# Altium PCB HeadBoard.PcbDoc
Units mil, origin at the board's own origin, x right, y up, seen from the top; angles counter-clockwise.
Board outline 3420.03 x 4025.03 mil, 2 copper layers (Top Layer, Bottom Layer); 34 components, 33 nets, 173 pads, 0 vias.
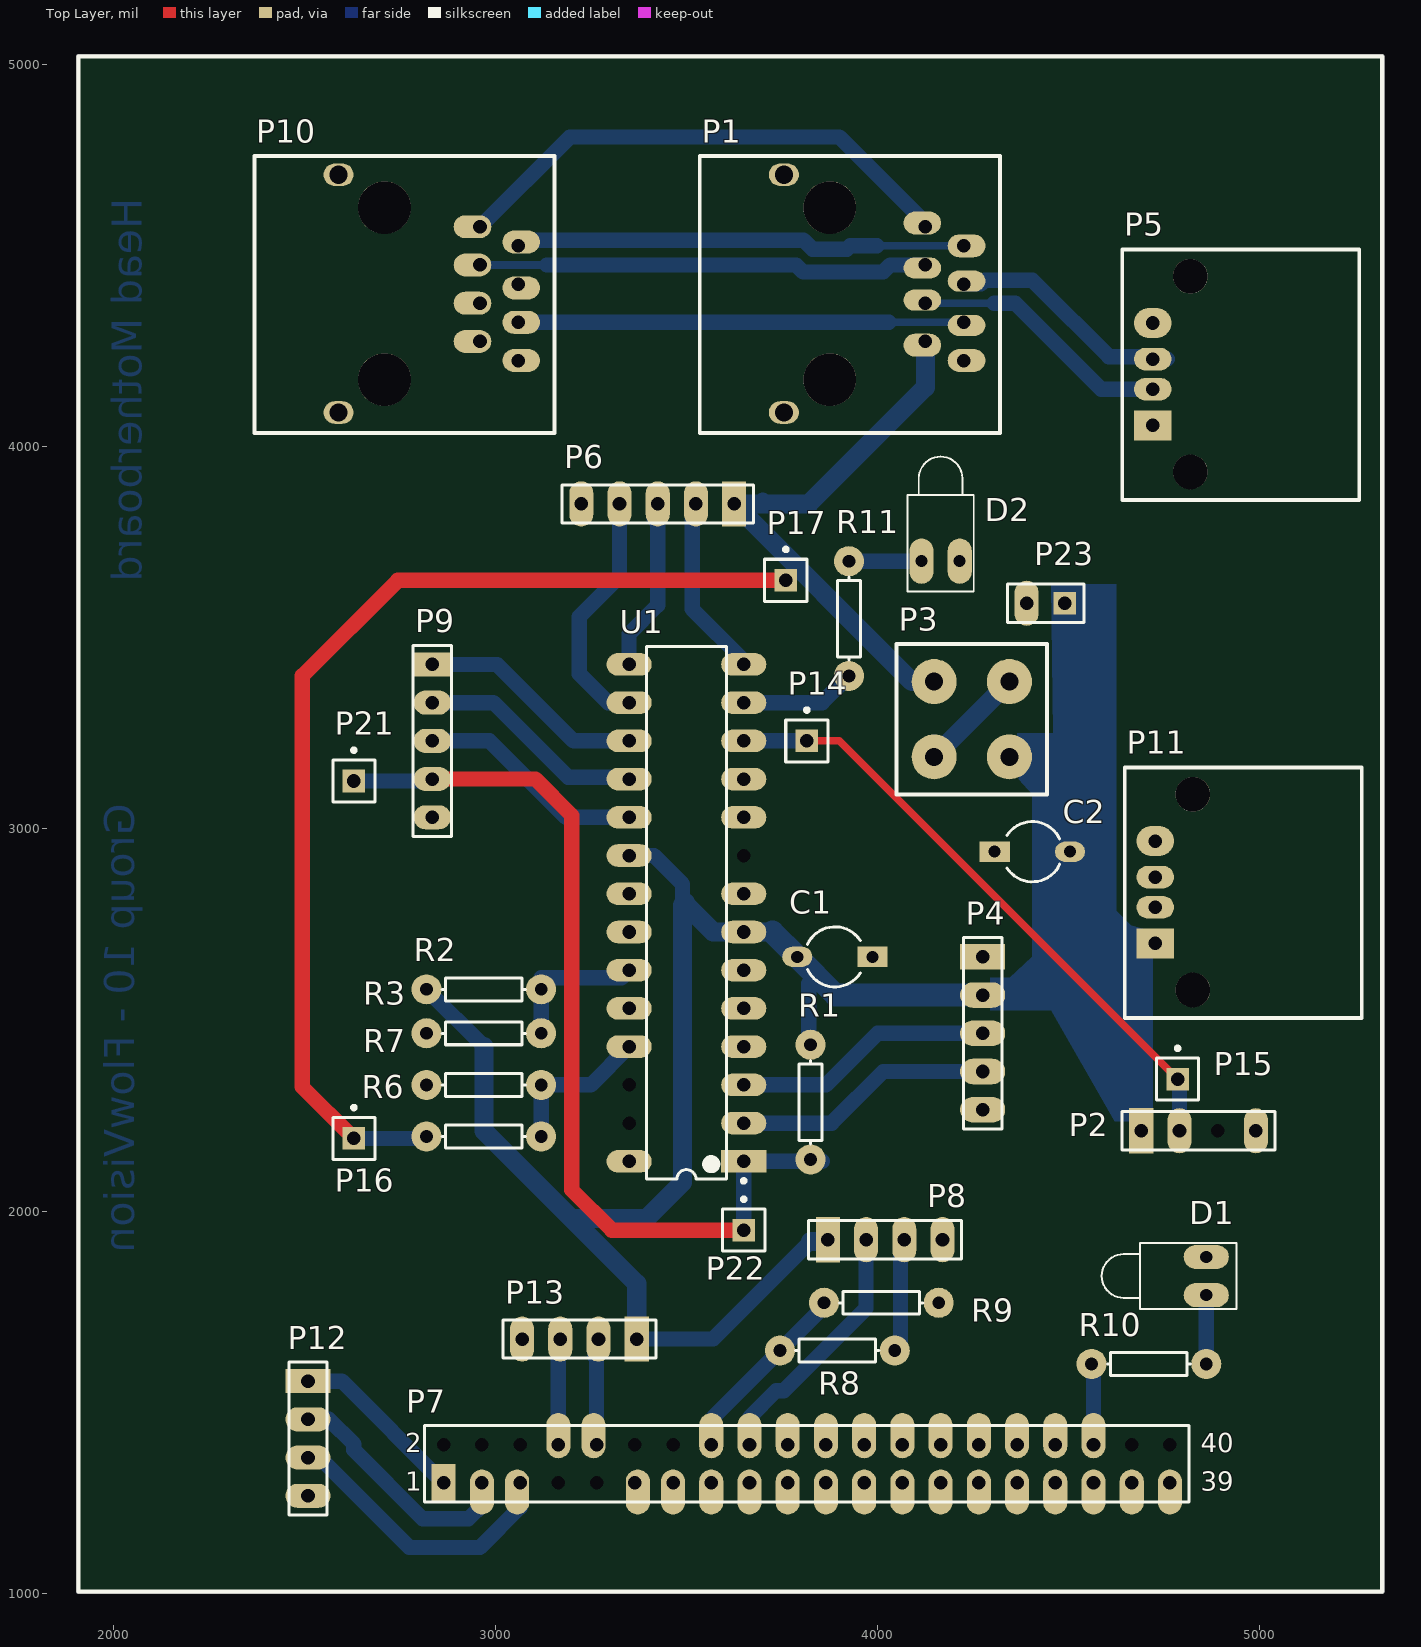
[diagram p0: Top Layer view]
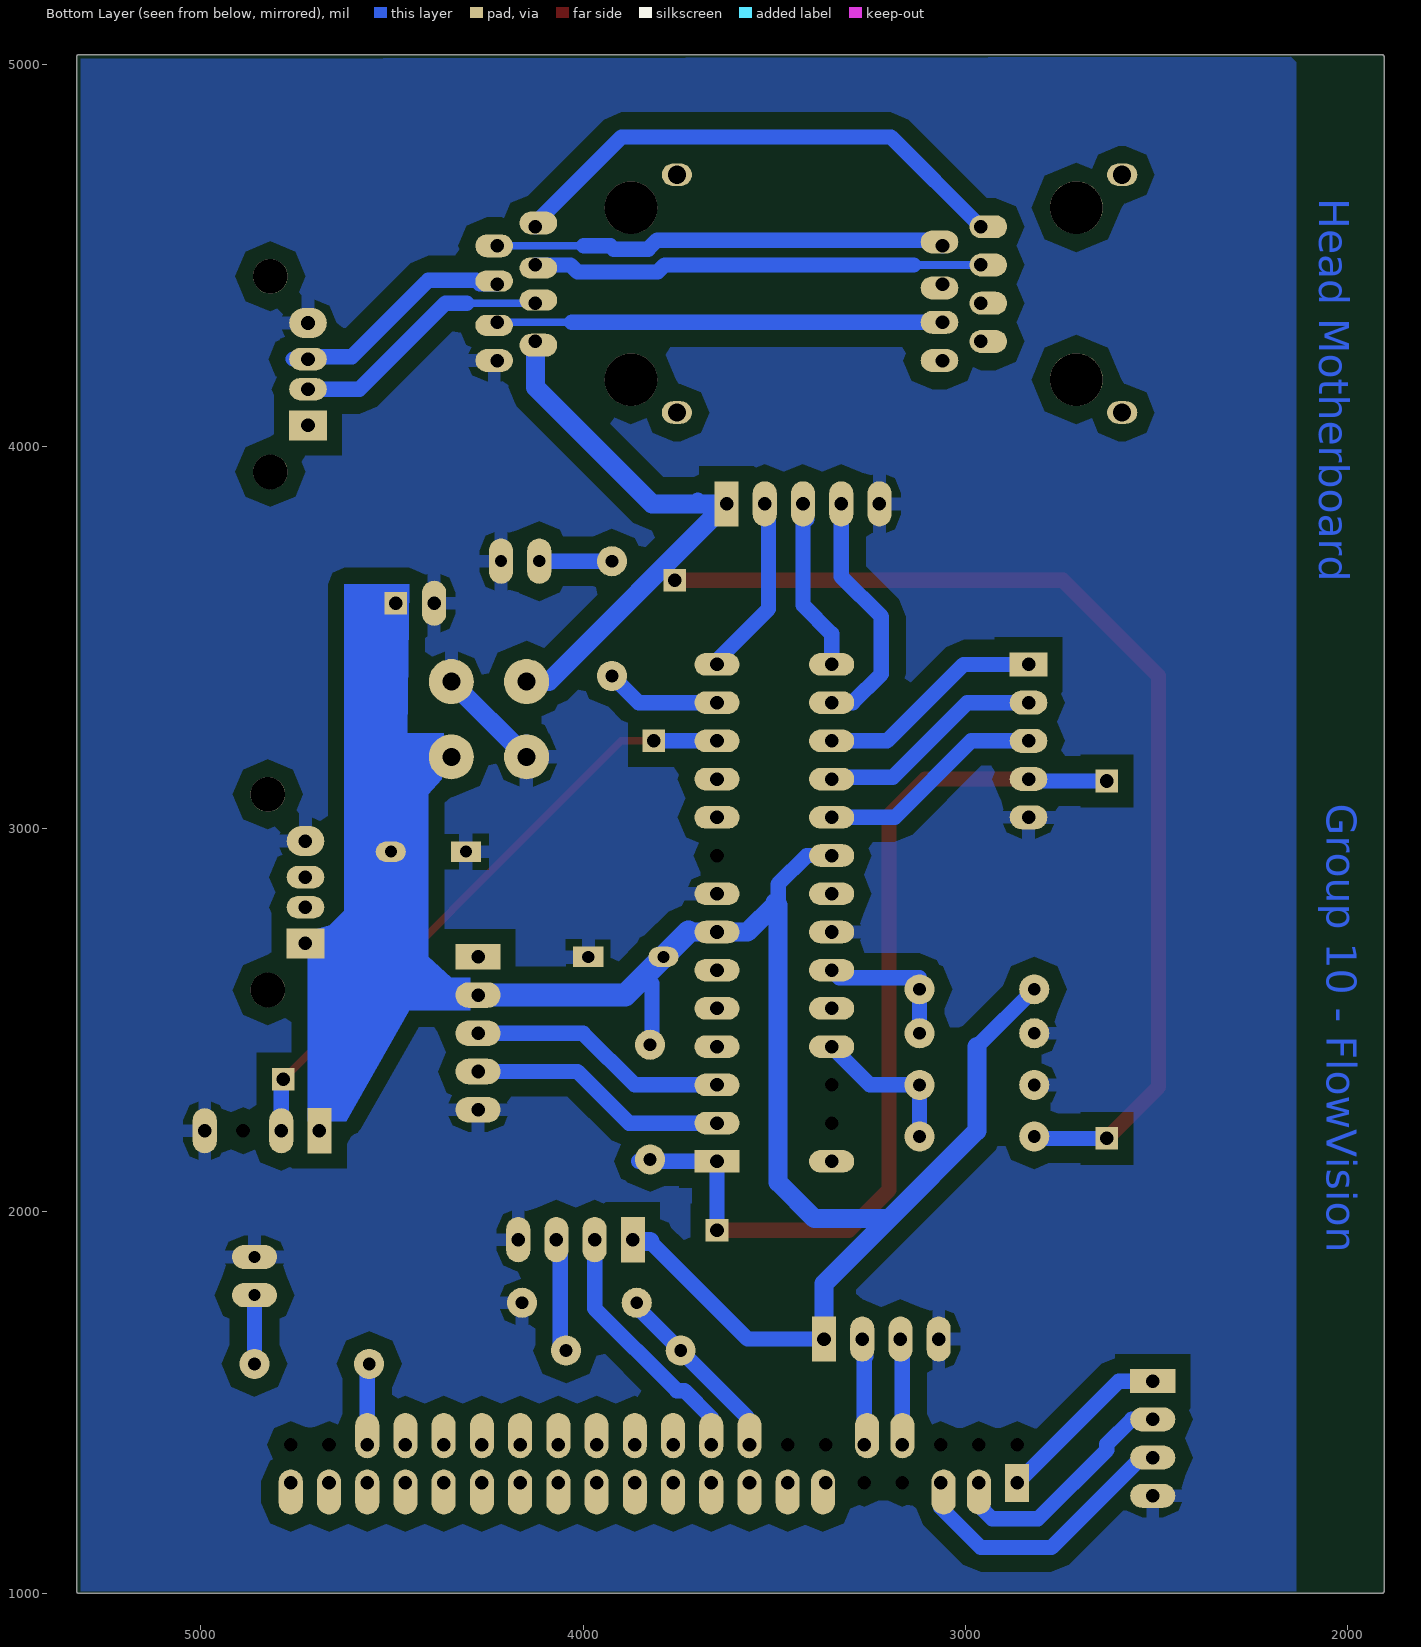
[diagram p1: Bottom Layer view, seen from below]

## Layer stack, top to bottom
Top Solder: solder mask 0.4, Solder Resist, Dk 3.5
Top Layer: signal copper 1.4
Dielectric 1: dielectric 12.6, FR-4, Dk 4.8
Bottom Layer: signal copper 1.4
Bottom Solder: solder mask 0.4, Solder Resist, Dk 3.5

## Board outline
1904.98,1005 ccw(c1910,1005) 1910,999.99 5320,999.99 ccw(c5320,1005) 5325.02,1005 5325.02,5020 ccw(c5320,5020) 5320,5025.02 1910,5025.02 ccw(c1910,5020) 1904.98,5020

## Design rules (kind name [scope] priority, off if disabled: settings)
Clearance [All] p1: gap=19.68 except(39.37: Arc-Poly Track-Poly SMDPad-Poly THPad-Poly Via-Poly Fill-Poly Poly-Poly Poly-Region)
PolygonConnect [All] p1: connectstyle=Relief reliefconductorwidth=35 reliefentries=4 polygonreliefangle="90 Angle" airgapwidth=20
RoutingVias [All] p1: holewidth=28 width=50 viastyle="Through Hole" minholewidth=28 minwidth=50 maxholewidth=28 maxwidth=50
SolderMaskExpansion [All] p1: expansion=4
Width [All] p1: maxlimit=70 minlimit=15 preferedwidth=20
30 further rules are at their usual default settings.

## Components (designator, comment, footprint, x,y, rotation, side; value= is the part's Value field where it differs from the comment)
C1 "Cap2" CAPR5-4X5 3888.43,2665 r180 top
C2 "Cap2" CAPR5-4X5 4405,2940 r0 top
D1 "Green" LED-1 4860,1830 r180 top
D2 "Red" LED-1 4165,3700 r90 top
P1 "RJ45 PUE - Tail" RJ45#1 4225,4525 r270 top
P2 "DHT11" HDR1X4#1 4690,2210 r0 top
P3 "Buck Conveter" PWR_HEADER 4246.57,3286.57 r270 top
P4 "USB to TTL - RPi" HDR1X5#1 4275,2665 r270 top
P5 "USB Data - RPi" USB_Female 4720,4055.51 r90 top
P6 "Flash" HDR1X5#2 3625,3850 r180 top
P7 "IDE GPIO - RPi" HDR2X20 2865,1288.62 r0 top
P8 "JSN-SR04T" HDR1X4#2 3870,1925 r0 top
P9 "ICSP" HDR1X5#3 2835,3430 r270 top
P10 "RJ45 Ethernet - RPi" RJ45#2 3060,4525 r270 top
P11 "USB Power - RPi" USB_Female 4726.57,2700.24 r90 top
P12 "ADXL345" HDR1X4#2 2510,1555 r270 top
P13 "RPi UART" HDR1X4#2 3370,1665 r180 top
P14 "Plug" PIN1 3815,3230 r0 top
P15 "Plug" PIN1 4785,2345 r0 top
P16 "Plug" PIN1 2630,2190 r0 top
P17 "Plug" PIN1 3760,3650 r0 top
P21 "Plug" PIN1 2630,3125 r0 top
P22 "Plug" PIN1 3650,1950 r0 top
P23 "Extra" HDR1X2 4490,3590 r180 top
R1 "Res1" AXIAL-0.3 3825,2285 r90 top
R2 "Res1" AXIAL-0.3 2970,2580 r180 top
R3 "Res1" AXIAL-0.3 2970,2465 r0 top
R6 "Res1" AXIAL-0.3 2970,2195 r180 top
R7 "Res1" AXIAL-0.3 2970,2330 r0 top
R8 "Res1" AXIAL-0.3 3895,1635 r180 top
R9 "Res1" AXIAL-0.3 4010,1760 r180 top
R10 "Res1" AXIAL-0.3 4710,1600 r180 top
R11 "Res1" AXIAL-0.3 3925,3550 r270 top
U1 "ATmega328-PU" 28P3 3500,2780 r180 top

## Footprints (in the part's own frame and the unit in brackets; to place one, negate y for a bottom-side part, rotate by r counter-clockwise, add the part's x,y. Pads: shape width x height; smd on the part's side, far side on the other; paste and mask are expansions set on the pad)
28P3 [mm] "DIP, 28-Leads, Row Spacing 7.62mm, Pitch 2.54mm, Body 34.67x7.3mm"
  rect 3x1.5 hole 0.9: 1(-3.81,16.51)
  oval 3x1.5 hole 0.9: 2(-3.81,13.97) 3(-3.81,11.43) 4(-3.81,8.89) 5(-3.81,6.35) 6(-3.81,3.81) 7(-3.81,1.27) 8(-3.81,-1.27) 10(-3.81,-6.35) 11(-3.81,-8.89) 12(-3.81,-11.43) 13(-3.81,-13.97) 14(-3.81,-16.51) 15(3.81,-16.51) 16(3.81,-13.97) 17(3.81,-11.43) 18(3.81,-8.89) 19(3.81,-6.35) 20(3.81,-3.81) 21(3.81,-1.27) 22(3.81,1.27) 23(3.81,3.81) 24(3.81,6.35) 25(3.81,8.89) 28(3.81,16.51)
  round 0.5 hole 0.9: 9(-3.81,-3.81) 26(3.81,11.43) 27(3.81,13.97)
  silkscreen extent -3.94,-17.7 2.65,17.93, body extent -3.6,-17.65 3.6,17.65, height 4.58
AXIAL-0.3 [mm] "Axial Device, Thru-Hole; 2 Leads; 0.3 in Pin Spacing"
  round 2 hole 0.85: 1(-3.81,0) 2(3.81,0)
  silkscreen extent -2.77,-0.76 2.77,0.76
CAPR5-4X5 [mm] "Capacitor; 2 Leads"
  rect 2x1.35 hole 0.8: 1(-2.5,0)
  oval 2x1.35 hole 0.8: 2(2.5,0)
  silkscreen extent -1.69,-2 1.82,2
HDR1X2 [mm] "Connector; Header; 2 Position"
  rect 1.5x1.5 hole 0.9: 1(0,0)
  oval 1.6x3 hole 0.9: 2(2.54,0)
  silkscreen extent -1.27,-1.27 3.81,1.27
HDR1X4#1 [mm] "Connector; Header; 4 Position"
  rect 1.6x3 hole 0.9: 1(0,0)
  oval 1.6x3 hole 0.9: 2(2.54,0) 4(7.62,0)
  round 0.508 hole 0.9: 3(5.08,0)
  silkscreen extent -1.27,-1.27 8.89,1.27
HDR1X4#2 [mm] "Connector; Header; 4 Position"
  rect 1.6x3 hole 0.9: 1(0,0)
  oval 1.6x3 hole 0.9: 2(2.54,0) 3(5.08,0) 4(7.62,0)
  silkscreen extent -1.27,-1.27 8.89,1.27
HDR1X5#1 [mm] "Connector; Header; 5 Position"
  rect 1.7x3 hole 0.9: 1(0,0)
  oval 1.7x3 hole 0.9: 2(2.54,0) 3(5.08,0) 4(7.62,0) 5(10.16,0)
  silkscreen extent -1.27,-1.27 11.43,1.27
HDR1X5#2 [mm] "Connector; Header; 5 Position"
  rect 1.6x3 hole 0.9: 1(0,0)
  oval 1.6x3 hole 0.9: 2(2.54,0) 3(5.08,0) 4(7.62,0) 5(10.16,0)
  silkscreen extent -1.27,-1.27 11.43,1.27
HDR1X5#3 [mm] "Connector; Header; 5 Position"
  rect 1.6x2.5 hole 0.9: 1(0,0)
  oval 1.6x2.5 hole 0.9: 2(2.54,0) 3(5.08,0) 4(7.62,0) 5(10.16,0)
  silkscreen extent -1.27,-1.27 11.43,1.27
HDR2X20 [mm] "Connector; Header; 20x2 Position"
  rect 1.6x2.543 hole 0.9: 1(0,0)
  round 0.5 hole 0.9: 2(0,2.54) 4(2.54,2.54) 6(5.08,2.54) 7(7.62,0) 9(10.16,0) 12(12.7,2.54) 14(15.24,2.54) 38(45.72,2.54) 40(48.26,2.54)
  oval 1.6x3 hole 0.9 copper offset 0,-0.6: 3(2.54,0) 13(15.24,0) 15(17.78,0) 17(20.32,0) 19(22.86,0) 21(25.4,0) 23(27.94,0) 25(30.48,0) 27(33.02,0) 29(35.56,0) 31(38.1,0) 33(40.64,0) 35(43.18,0) 37(45.72,0) 39(48.26,0)
  oval 1.6x3 hole 0.9 copper offset -0.2,-0.6: 5(5.08,0)
  oval 1.6x3 hole 0.9 copper offset 0,0.6: 8(7.62,2.54) 16(17.78,2.54) 18(20.32,2.54) 20(22.86,2.54) 22(25.4,2.54) 24(27.94,2.54) 26(30.48,2.54) 28(33.02,2.54) 30(35.56,2.54) 32(38.1,2.54) 34(40.64,2.54) 36(43.18,2.54)
  oval 1.6x3 hole 0.9 copper offset -0.2,0.6: 10(10.16,2.54)
  oval 1.6x3 hole 0.9 copper offset 0.2,-0.6: 11(12.7,0)
  silkscreen extent -1.27,-1.27 49.53,3.81
LED-1 [mm] "LED; 2 Leads"
  oval 3x1.6 hole 0.8: 1(0,1.27) 2(0,-1.27)
  silkscreen extent -2,-2.2 6.95,2.2
PIN1 [mm] "Connector; Plug"
  rect 1.5x1.5 hole 0.9: 1(0,0)
  silkscreen extent -1.4,-1.4 1.4,2.17
PWR_HEADER [mm] "4 port power header"
  round 3 hole 1.2: 1(-2.5,2.5) 2(2.5,2.5) 3(-2.5,-2.5) 4(2.5,-2.5)
  silkscreen extent -5,-5 5,5
RJ45#1 [mm]
  oval 1.524x2.5 hole 0.9 copper offset 0,0.2: 1(7.62,0) 7(0,0)
  oval 1.524x2.5 hole 0.9 copper offset 0.25,-0.2: 2(6.35,-2.54)
  oval 1.4x2.5 hole 0.9 copper offset 0.2,0.2: 3(5.08,0)
  oval 1.4x2.5 hole 0.9 copper offset -0.2,-0.2: 4(3.81,-2.54)
  oval 1.4x2.5 hole 0.9 copper offset -0.2,0.2: 5(2.54,0)
  oval 1.4x2.5 hole 0.9 copper offset 0.2,-0.2: 6(1.27,-2.54)
  oval 1.524x2.5 hole 0.9 copper offset -0.25,-0.2: 8(-1.27,-2.54)
  round 3.5 hole 3.5: 9(-2.54,-8.89) 10(8.89,-8.89)
  oval 1.5x2 hole 1.2: 11(-4.725,-11.94) 12(11.075,-11.94)
  silkscreen extent -5.97,-17.53 12.45,2.41
RJ45#2 [mm]
  oval 1.524x2.5 hole 0.9 copper offset 0,0.2: 1(7.62,0) 3(5.08,0)
  oval 1.524x2.5 hole 0.9 copper offset 0,-0.5: 2(6.35,-2.54) 4(3.81,-2.54) 6(1.27,-2.54) 8(-1.27,-2.54)
  oval 1.524x2.5 hole 0.9 copper offset 0.254,0.2: 5(2.54,0)
  oval 1.524x2.5 hole 0.9 copper offset -0.254,0.2: 7(0,0)
  round 3.5 hole 3.5: 9(-2.54,-8.89) 10(8.89,-8.89)
  oval 1.5x2 hole 1.2: 11(-4.725,-11.94) 12(11.075,-11.94)
  silkscreen extent -5.97,-17.53 12.45,2.41
USB_Female [mm]
  rect 2x2.5 hole 0.9: 1(0,0)
  oval 1.5x2.5 hole 0.9: 2(2.4,0) 3(4.4,0)
  oval 2x2.5 hole 0.9: 4(6.8,0)
  round 2.3 hole 2.3: 5(-3.1,-2.5) 5(9.9,-2.5)
  silkscreen extent -4.95,-13.72 11.68,2.03

## Part data
C1 C2: "Capacitor"
D1 D2: library part LED1, "Typical RED GaAs LED"
P1 P10: library part "Header 8", "Header, 8-Pin"
P2 P5 P8 P11 P12 P13: library part "Header 4", "Header, 4-Pin"
P3: library part "Header 2X2", "Header, 2-Pin, Dual row"
P4 P6 P9: library part "Header 5", "Header, 5-Pin"
P7: library part "Header 20X2", "Header, 20-Pin, Dual row"
P23: library part "Header 2", "Header, 2-Pin"
R1 R2 R3 R6 R7 R8 R9 R10 R11: "Resistor"
U1: "8-bit AVR Microcontroller, 32KB Flash, 1KB EEPROM, 2KB SRAM, 28-pin PDIP, Industrial Grade (-40°C to 85°C)"

## Nets (pads, with @x,y where several pads share a name; then routed paths per layer and width w, separated by ;. In a path a pad name is that pad's centre, name@x,y a point inside that pad or via, vN(x,y) a via of type N, cw(c..) or ccw(c..) an arc to the next point about the centre after c; other vN are vias at no path point)
3V3: P7.1 P12.1 | length 465.3
  Bottom Layer w40: P12.1 2598.62,1555 P7.1
BUCK_IN: P1.2 P3.3 P6.1 P16.1 P17.1 R6.2 | length 4253.6
  Top Layer w40: P16.1 2495,2325 2495,3400 2745,3650 P17.1
  Bottom Layer w40: P16.1 2815,2190 R6.2 ; 3700,3850 3700,3860
  Bottom Layer w50: P6.1 4090,3385 P3.3 ; P6.1@3655,3850 3700,3850 3820,3850 4125,4155 P1.2@4125,4260
BUCK_IN_MON: R6.1 R7.2 U1.25 | length 406.4
  Bottom Layer w40: R6.1 R7.2 3250,2330 U1.25
CHIP_LED: R11.2 U1.13 | length 304
  Bottom Layer w40: U1.13 3855,3330 R11.2
CON_RXD: P7.10 P13.2 | length 233.1
  Bottom Layer w40: P13.2@3260,1619.69 3265,1614.69 P7.10
CON_TXD: P7.8 P13.3 | length 233.1
  Bottom Layer w19.68: P13.3@3160,1619.69 P13.3@3165,1614.69
  Bottom Layer w40: P7.8 P13.3@3165,1614.69
D+: P1.5 P5.3 | length 623.1
  Bottom Layer w40: P1.5 4270.59,4425 4280.28,4434.69 4405.31,4434.69 4415,4425 4420,4420 4605,4235 4713.74,4235 P5.3 P5.3@4758.74,4228.74
D-: P1.4 P5.2 | length 688.2
  Bottom Layer w20: P1.4 4305,4375
  Bottom Layer w40: 4305,4375 4360,4375 4585,4150 P5.2
DHT11_D: P2.2 P14.1 P15.1 U1.12 | length 1645.7
  Top Layer w20: P14.1 3900,3230 P15.1
  Bottom Layer w40: U1.12 P14.1 ; P2.2@4785,2215 P2.2 4790,2340 P15.1
ECHO: P8.3 R8.1 | length 300.4
  Bottom Layer w40: R8.1 4060,1650 4060,1915 P8.3
FLASH1_D: P6.2 U1.14 | length 435.9
  Bottom Layer w40: P6.2@3515,3810 3515,3575 3650,3440 U1.14
FLASH2_D: P6.3 U1.15 | length 415.2
  Bottom Layer w40: U1.15 3350,3510 3425,3585 3425,3800 P6.3@3415,3810
FLASH3_D: P6.4 U1.16 | length 649.6
  Bottom Layer w40: P6.4 3325,3660 3220,3555 3220,3405 3295,3330 U1.16
GND: C1.1 C2.1 D1.2 D2.2 P1.1 P2.4 P3.1 P3.4 P4.5 P5.4 P6.5 P8.4 P9.5 P11.4 P12.4 P13.4 P23.2 R3.1 R7.1 R9.1 U1.8 U1.22 | length 312.1
  Bottom Layer w50: P3.4@4148.15,3221.85 P3.4 P3.1
MISO: P9.2 U1.18 | length 597.8
  Bottom Layer w40: P9.2 2995,3330 3190,3135 3345,3135 U1.18
MOSI: P9.1 U1.17 | length 597.8
  Bottom Layer w40: P9.1 3005,3430 3205,3230 U1.17
NetD1_1: D1.1 R10.1 | length 180
  Bottom Layer w40: R10.1 D1.1
NetD2_1: D2.1 R11.1 | length 190
  Bottom Layer w40: R11.1 D2.1
NetP7_16: P7.16 R8.2 R9.2 | length 481.5
  Bottom Layer w40: P7.16 P7.16@3565,1450 ; P7.16@3570,1460 R8.2 3860,1750 R9.2
RESET: P9.4 P21.1 P22.1 R1.1 U1.1 | length 2469.9
  Top Layer w40: P9.4 3105,3130 3200,3035 3200,2055 3305,1950 P22.1
  Bottom Layer w40: P21.1 2830,3125 P9.4 ; P22.1 U1.1 R1.1@3855,2130
RPI_LED: P7.36 R10.2 | length 213.4
  Bottom Layer w40: R10.2 4565,1595 P7.36
RX+: P1.6 P10.6 | length 1180.1
  Bottom Layer w20: P10.6 3135,4475
  Bottom Layer w40: 3135,4475 3787.03,4475 3805.3,4456.73 4014.72,4456.73 4032.99,4475 P1.6
RX-: P1.3 P10.3 | length 1165
  Bottom Layer w20: 4030,4325 P1.3
  Bottom Layer w40: P10.3 4030,4325
RXD: P4.4 U1.2 | length 680.9
  Bottom Layer w40: U1.2 3880,2230 4015,2365 P4.4
SCK: P9.3 U1.19 | length 597.8
  Bottom Layer w40: P9.3 2985,3230 3185,3030 U1.19
SCL: P7.5 P12.3 | length 759.5
  Bottom Layer w40: P12.3 2540,1355 2775,1120 2960,1120 3065,1225 P7.5
SDA: P7.3 P12.2 | length 644.6
  Bottom Layer w40: P12.2 2565,1455 2630,1390 2630,1375 2810,1195 2930,1195 2965,1230 P7.3
TRIG: P7.18 P8.2 | length 674.4
  Bottom Layer w40: P7.18 3665,1460 3735,1530 3755,1530 3970,1745 P8.2
TX+: P1.8 P10.8 | length 1365.5
  Bottom Layer w40: P10.8 3195,4810 3900,4810 4125,4585 P1.8
TX-: P1.7 P10.7 | length 1184.5
  Bottom Layer w20: 3998.58,4525 P1.7
  Bottom Layer w40: P10.7 3075,4540 3806.44,4540 3830.02,4516.42 3919.98,4516.42 3928.56,4525 3998.58,4525
TXD: P4.3 U1.3 | length 680.9
  Bottom Layer w40: U1.3 3865,2330 4000,2465 P4.3
VCC: C1.2 C2.2 P2.1 P3.2 P4.2 P8.1 P11.1 P13.1 P23.1 R1.2 R2.2 U1.7 U1.20 | length 4135.2
  Bottom Layer w40: R2.2 2970,2430 ; U1.20 3415,2930 3490,2855 3490,2800 ; P13.1 3570,1665 3825,1920 ; R1.2@3820,2440 3820,2595
  Bottom Layer w50: 2970,2430 2970,2210 3200,1980 ; U1.20@3325,2930 U1.20 ; P13.1 3370,1810 3200,1980 ; 3497.5,2807.5 3495,2805 ; 3725,2730 U1.7 3570,2730 3495,2805 ; 3825,1920 P8.1@3860,1920 ; P11.1@4680.24,2700.24 P11.1 ; 3200,1980 3395,1980 3490,2075 3490,2800 3495,2805
  Bottom Layer w60: 3725,2730 C1.2 3890,2565 P4.2
VCC_MON: R2.1 R3.2 U1.23 | length 390.4
  Bottom Layer w40: R3.2@3125,2460 R3.2 R2.1 3120,2610 3330,2610 U1.23
pads on no net: P1.9 P1.10 P1.11 P1.12 P2.3 P4.1 P5.1 P5.5 P7.2 P7.4 P7.6 P7.7 P7.9 P7.11 P7.12 P7.13 P7.14 P7.15 P7.17 P7.19 P7.20 P7.21 P7.22 P7.23 P7.24 P7.25 P7.26 P7.27 P7.28 P7.29 P7.30 P7.31 P7.32 P7.33 P7.34 P7.35 P7.37 P7.38 P7.39 P7.40 P10.1 P10.2 P10.4 P10.5 P10.9 P10.10 P10.11 P10.12 P11.2 P11.3 P11.5 U1.4 U1.5 U1.6 U1.9 U1.10 U1.11 U1.21 U1.24 U1.26 U1.27 U1.28

## Polygon pours and split planes (outlines as drawn)
GND on Bottom Layer "Bottom Layer-No Net" (solid, remove dead copper, pour order 2): 2135,5020 5315,5015 5315,1005 5320,1005 2135,1005

## Other copper
Bottom Layer:
  region net VCC: 4455,3640 4535,3640 4625,3640 4625,2786.14 4663.07,2748.07 4720.34,2730 4720.34,2425.34 4720.34,2234.9 4634.9,2234.9 4620,2234.9 4455,2525 4295,2525 4295,2610 4345.23,2610 4405,2665 4405,3090 4370,3130 4365,3250 4460,3250
  text "Head Motherboard" at 2075,4650 h78.74 r90
  text "Group 10 - FlowVision" at 2055,3065 h78.74 r90

## Silkscreen, mask and mechanical layers (free items; w line width, h text height)
Top Overlay:
  lines w10: 1910,1005 5320,1005 5320,5020 1910,5020 1910,1005

## Text inside footprints (layer, text, board x,y; h text height)
P7: Top Overlay "39" at 4845,1268.62 h50; Top Overlay "40" at 4845,1368.62 h50; Top Overlay "2" at 2765,1368.62 h50; Top Overlay "1" at 2765,1268.62 h50